# Altium PCB POETIC_Processor_V2b.PcbDoc
Units mm, origin at the board's own origin, x right, y up, seen from the top; angles counter-clockwise.
Board outline 40 x 100 mm, 2 copper layers (Top Layer, Bottom Layer), stack 0.57 mm thick; 36 components, 395 nets, 163 pads, 24 vias.
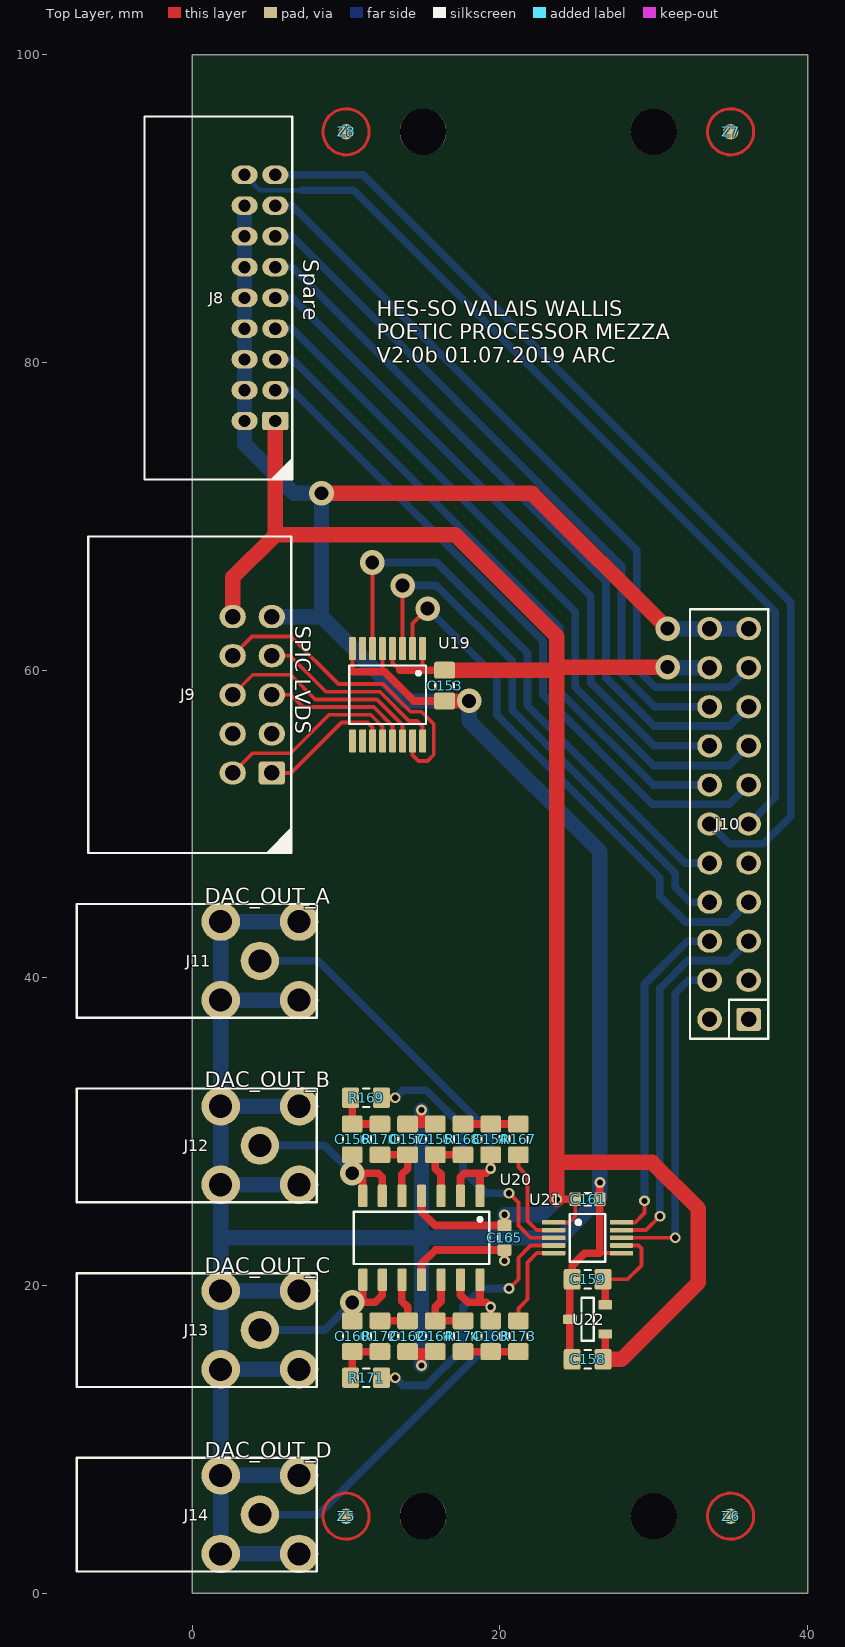
[diagram p0: Top Layer view]
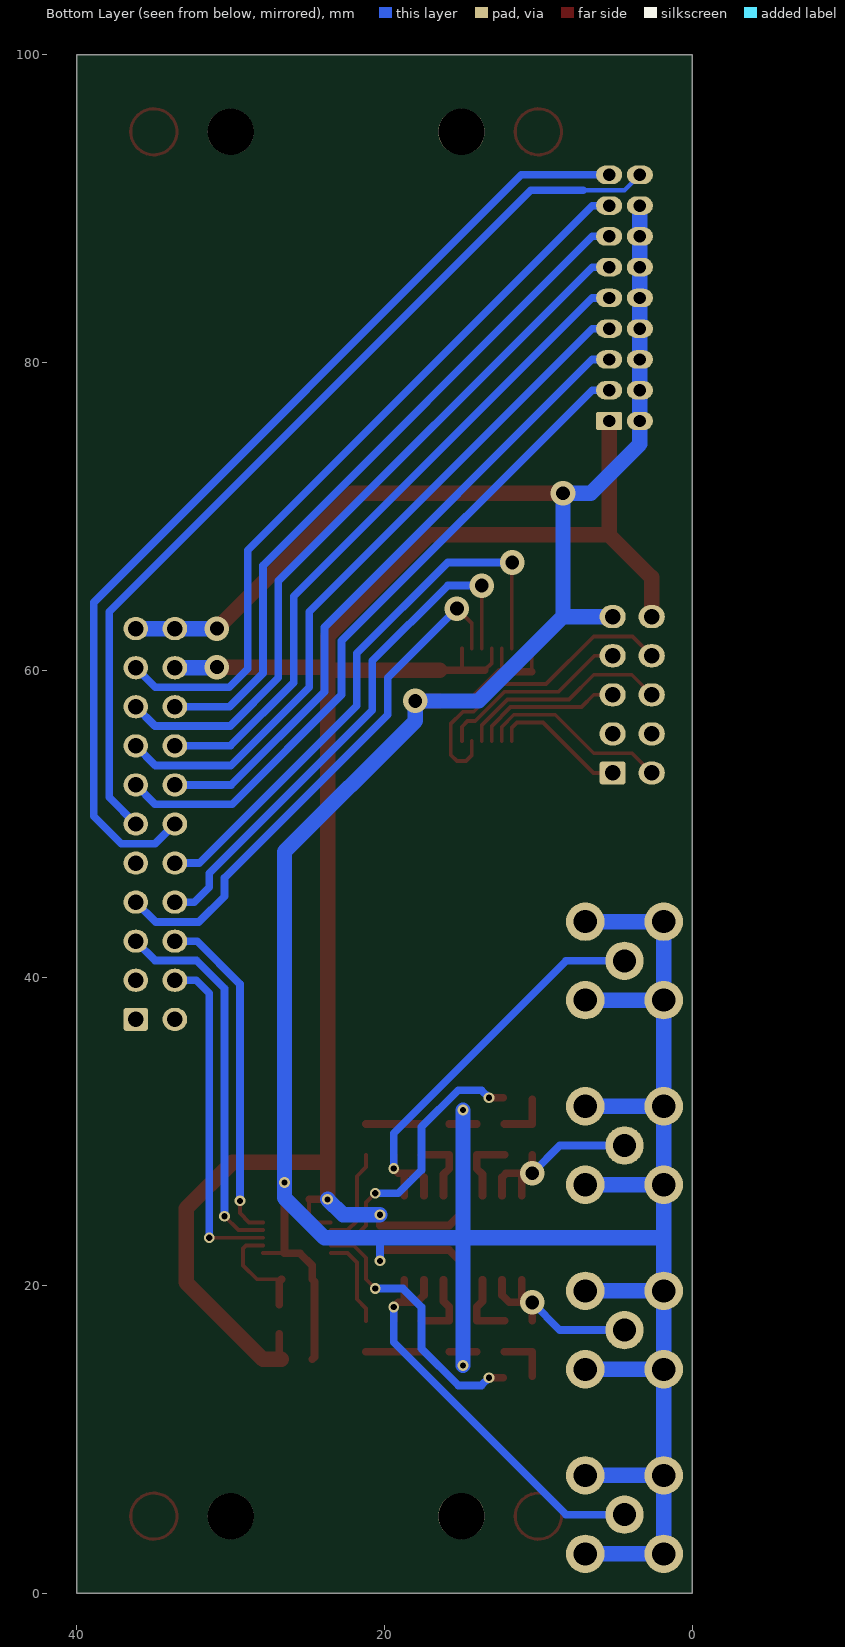
[diagram p1: Bottom Layer view, seen from below]

## Layer stack, top to bottom
Top Layer: signal copper 0.035
Dielectric 2: prepreg 0.5, FR-4, Dk 4.2
Bottom Layer: signal copper 0.035

## Board outline
0,0 40,0 40,100 0,100

## Design rules (kind name [scope] priority, off if disabled: settings)
AcuteAngle [All] p1: minimum=9.00000000000000E+0001 checktracksonly=TRUE
AssemblyTestPointUsage [All] p1 off:
AssemblyTestpoint [All] p1 off: testpointundercomponent=TRUE minsize=1.016 maxsize=2.54 preferedsize=1.524 minholesize=0 maxholesize=1.016 preferedholesize=0.813 testpointgrid=0.025 usegrid=TRUE gridtolerance=0 allowsidetop=TRUE allowsidebottom=TRUE
BoardOutlineClearance [All] p1 off: gap=0.25 ignorepadtopadclearanceinfootprint=FALSE
Clearance [All] p1: gap=0.25 ignorepadtopadclearanceinfootprint=FALSE except(0: Arc-Hole Track-Hole SMDPad-Hole THPad-Hole Via-Hole Fill-Hole Poly-Hole Region-Hole Text-Hole; 0.2: Arc-Track Arc-SMDPad Track-Track Track-SMDPad SMDPad-SMDPad)
ComponentClearance [All] p1 off: gap=0.25 collisioncheckmode=3 verticalgap=0.25 showdistances=FALSE
DiffPairsRouting [All] p1 off: maxlimit=0.254 minlimit=0.254 mostfreqgap=0.254 toplayer_minwidth=0.381 toplayer_maxwidth=0.381 toplayer_prefwidth=0.381 bottomlayer_minwidth=0.381 bottomlayer_maxwidth=0.381 bottomlayer_prefwidth=0.381 maxuncoupledlength=12.7
FabricationTestPointUsage [All] p1 off: valid=0 allowmultiple=FALSE
FabricationTestpoint [All] p1 off: side=3 testpointundercomponent=TRUE minsize=1.016 maxsize=2.54 preferedsize=1.524 minholesize=0 maxholesize=1.016 preferedholesize=0.813 testpointgrid=0.025 allowsidetop=TRUE allowsidebottom=TRUE usegrid=TRUE gridtolerance=0
FanoutControl Fanout_BGA [IsBGA] p1 off: bgadir=Out bgaviamode=Centered fanoutstyle=Auto fanoutdirection=Alternating viagrid=0.025 // Fanout_BGA (Default Rule)
FanoutControl Fanout_LCC [IsLCC] p2 off: bgadir=Out bgaviamode=Centered fanoutstyle=Auto fanoutdirection=Alternating viagrid=0.025 // Fanout_LCC (Default Rule)
FanoutControl Fanout_SOIC [IsSOIC] p3 off: bgadir=Out bgaviamode=Centered fanoutstyle=Auto fanoutdirection=Alternating viagrid=0.025 // Fanout_SOIC (Default Rule)
FanoutControl Fanout_Small [(CompPinCount < 5)] p4 off: bgadir=Out bgaviamode=Centered fanoutstyle=Auto fanoutdirection=OutThenIn viagrid=0.025 // Fanout_Small (Default Rule)
FanoutControl Fanout_Default [All] p5 off: bgadir=Out bgaviamode=Centered fanoutstyle=Auto fanoutdirection=Alternating viagrid=0.025 // Fanout_Default (Default Rule)
Height [All] p1 off: minheight=0 maxheight=25.4 prefheight=12.7
HoleSize [All] p1 off: absolutevalues=TRUE maxlimit=3 minlimit=0.15 maxpercent=80.000 minpercent=20.000
HoleToHoleClearance [All] p1 off: gap=0.25 allowstackedmicrovias=TRUE
LayerPairs [All] p1 off: enforce=TRUE
MinimumAnnularRing [All] p1 off: minimumring=0.35
MinimumSolderMaskSliver [All] p1 off: minsoldermaskwidth=0
PasteMaskExpansion [All] p1 off: expansion=0
PlaneClearance [All] p1: clearance=0.25
PlaneConnect [All] p1: planeconnectstyle=Relief reliefexpansion=0.25 reliefentries=4 reliefconductorwidth=0.25 reliefairgap=0.25
PolygonConnect [All] p1: connectstyle=Relief reliefconductorwidth=0.25 reliefentries=4 polygonreliefangle="90 Angle" airgapwidth=0.25
RoutingCorners [All] p1 off: cornerstyle=45-Degree minsetback=2.5 maxsetback=2.5
RoutingLayers [All] p1 off: top layer_v5=TRUE bottom layer_v5=TRUE
RoutingPriority [All] p1 off: routingpriority=0
RoutingTopology [All] p1 off: topology=Shortest
RoutingVias [All] p1: holewidth=0.4 width=0.7 viastyle="Through Hole" minholewidth=0.4 minwidth=0.7 maxholewidth=0.4 maxwidth=0.7
SilkToBoardRegionClearance [All] p1 off:
SilkToSilkClearance [All] p1 off: silktosilkclearance=0
SilkToSolderMaskClearance [IsPad] p1 off: minsilkscreentomaskgap=0 clearancetoexposedcopper=TRUE
SolderMaskExpansion [All] p1 off: expansion=0
Width [All] p1: maxlimit=10 minlimit=0.2 preferedwidth=1
4 further rules are at their usual default settings.

## Classes and differential pairs
component class Processor: Z5 Z6 Z7 Z8
component class Supply: TP3
component class Mezz_Board: C153 C154 C155 C156 C157 C158 C159 C160 C161 C162 C163 C164 C165 J8 J9 J10 J11 J12 J13 J14 R167 R168 R169 R170 R171 R172 R173 R174 U19 U20 U21 U22

## Components (designator, comment, footprint, x,y, rotation, side; value= is the part's Value field where it differs from the comment)
C153 "100n" "CAPACITOR 2012 REFLOW" 16.4,59 r90 top
C154 "100p" "CAPACITOR 2012 REFLOW" 19.4,29.5 r270 top
C155 "150p" "CAPACITOR 2012 REFLOW" 15.8,29.5 r270 top
C156 "100p" "CAPACITOR 2012 REFLOW" 10.4,29.5 r270 top
C157 "150p" "CAPACITOR 2012 REFLOW" 14,29.5 r270 top
C158 "100n" "CAPACITOR 2012 REFLOW" 25.7,15.2 r0 top
C159 "1u" "CAPACITOR 2012 REFLOW" 25.7,20.4 r0 top
C160 "100p" "CAPACITOR 2012 REFLOW" 10.4,16.7 r90 top
C161 "100n" "CAPACITOR 1608 REFLOW" 25.7,25.6 r180 top
C162 "150p" "CAPACITOR 2012 REFLOW" 14,16.7 r90 top
C163 "100p" "CAPACITOR 2012 REFLOW" 19.4,16.7 r90 top
C164 "150p" "CAPACITOR 2012 REFLOW" 15.8,16.7 r90 top
C165 "100n" "CAPACITOR 1608 REFLOW" 20.299,23.1 r90 top
J8 "98464-G61-18ULF" "FlatCable2x9 2MM Right Angle TH FCI 98614-G61-18ULF" 4.4,84.2 r270 top
J9 "61201021721" "FlatCable2x5 2.54MM RIGHT ANGLE TH" 3.9,58.4 r270 top
J10 "*" "PinHeader2x11 P2.54 A" 34.9,50 r90 top
J11 "CONSMA002-G" "SMA TH Right Angle Linx CONSMA002" 4.4,41.1 r0 top
J12 "CONSMA002-G" "SMA TH Right Angle Linx CONSMA002" 4.4,29.1 r0 top
J13 "CONSMA002-G" "SMA TH Right Angle Linx CONSMA002" 4.4,17.1 r0 top
J14 "CONSMA002-G" "SMA TH Right Angle Linx CONSMA002" 4.4,5.1 r0 top
R167 "3k3" "RESISTOR 2012 REFLOW" 21.2,29.5 r90 top
R168 "3k6" "RESISTOR 2012 REFLOW" 17.6,29.5 r270 top
R169 "3k3" "RESISTOR 2012 REFLOW" 11.3,32.2 r180 top
R170 "3k6" "RESISTOR 2012 REFLOW" 12.2,29.5 r270 top
R171 "3k3" "RESISTOR 2012 REFLOW" 11.3,14 r180 top
R172 "3k6" "RESISTOR 2012 REFLOW" 12.2,16.7 r90 top
R173 "3k3" "RESISTOR 2012 REFLOW" 21.2,16.7 r270 top
R174 "3k6" "RESISTOR 2012 REFLOW" 17.6,16.7 r90 top
U19 "DS90LV047ATMTC/NOPB" "TSSOP16 P0.65 C5.0x4.5 H1.1" 12.7,58.4 r270 top
U20 "AD8648ARZ-REEL7" "SO14 P1.27 C4.0X8.8 H1.75" 14.899,23.1 r270 top
U21 "DAC124S085CIMM/NOPB" "VSSOP10 P0.5 C3.1X3.1 H1.1" 25.7,23.1 r0 top
U22 "REF3130AIDBZTG4" "SOT23 P0.95 C1.6x3.0 H1.3" 25.7,17.8 r180 top
Z5 "1 - 3" FIDUCIAL 10,5 r0 top
Z6 "1 - 3" FIDUCIAL 35,5 r0 top
Z7 "1 - 3" FIDUCIAL 35,95 r0 top
Z8 "1 - 3" FIDUCIAL 10,95 r0 top

## Footprints (in the part's own frame and the unit in brackets; to place one, negate y for a bottom-side part, rotate by r counter-clockwise, add the part's x,y. Pads: shape width x height; smd on the part's side, far side on the other; paste and mask are expansions set on the pad)
"CAPACITOR 1608 REFLOW" [mm] "Capacitor SMD 1.6x0.8mm (0603-imperial)"
  rrect25% 0.75x0.9 smd: 1(-0.8,0) 2(0.8,0)
  silkscreen extent -0.2,-0.4 0.2,0.4, body extent -0.8,-0.4 0.8,0.4, height 0.8
"CAPACITOR 2012 REFLOW" [mm] "Capacitor SMD 2.0x1.2mm (0805-imperial)"
  rrect25% 1.1x1.35 smd: 1(-1,0) 2(1,0)
  silkscreen extent -0.2,-0.6 0.2,0.6, body extent -1,-0.6 1,0.6, height 1
FIDUCIAL [mm] "FIDUCIAL Din 1mm Dout 3mm"
  round 1 smd mask+1.2: 1(0,0)
  Top Layer circle w0.2: c0,0 r1.5
"FlatCable2x5 2.54MM RIGHT ANGLE TH" [mm] "FlatCable2x5 2.54MM Right Angle TH, DIN 41651, Generic"
  rrect25% 1.5x1.7 hole 1: 1(5.08,1.27)
  oval 1.5x1.7 hole 1: 2(5.08,-1.27) 3(2.54,1.27) 4(2.54,-1.27) 5(0,1.27) 6(0,-1.27) 7(-2.54,1.27) 8(-2.54,-1.27) 9(-5.08,1.27) 10(-5.08,-1.27)
  silkscreen extent -10.29,-10.67 10.29,2.54, body extent -10.16,-10.54 10.16,1.57, height 9.2
"FlatCable2x9 2MM Right Angle TH FCI 98614-G61-18ULF" [mm] "FlatCable2x9 2MM Right Angle TH FCI 98614-G61-18ULF"
  rrect25% 1.2x1.7 hole 0.8: 1(8,1)
  oval 1.2x1.7 hole 0.8: 2(8,-1) 3(6,1) 4(6,-1) 5(4,1) 6(4,-1) 7(2,1) 8(2,-1) 9(0,1) 10(0,-1) 11(-2,1) 12(-2,-1) 13(-4,1) 14(-4,-1) 15(-6,1) 16(-6,-1) 17(-8,1) 18(-8,-1)
  silkscreen extent -11.8,-7.5 11.8,2.1, body extent -10,-7.2 10,1.3, height 6.1
"PinHeader2x11 P2.54 A" [mm] "Plug connector"
  rrect25% 1.5x1.6 hole 1: 1(-12.7,-1.27)
  oval 1.5x1.6 hole 1: 2(-12.7,1.27) 3(-10.16,-1.27) 4(-10.16,1.27) 5(-7.62,-1.27) 6(-7.62,1.27) 7(-5.08,-1.27) 8(-5.08,1.27) 9(-2.54,-1.27) 10(-2.54,1.27) 11(0,-1.27) 12(0,1.27) 13(2.54,-1.27) 14(2.54,1.27) 15(5.08,-1.27) 16(5.08,1.27) 17(7.62,-1.27) 18(7.62,1.27) 19(10.16,-1.27) 20(10.16,1.27) 21(12.7,-1.27) 22(12.7,1.27)
  silkscreen extent -13.97,-2.54 13.97,2.54, body extent -13.97,-2.54 13.97,2.54, height 8.5
"RESISTOR 2012 REFLOW" [mm] "Resistor SMD 2.0x1.2mm (0805-imperial)"
  rrect25% 1.1x1.35 smd: 1(-1,0) 2(1,0)
  silkscreen extent -0.2,-0.6 0.2,0.6, body extent -1,-0.6 1,0.6, height 0.6
"SMA TH Right Angle Linx CONSMA002" [mm] "Connector SMA TH Right Angle Linx CONSMA002"
  round 2.5 hole 1.5: 1(0,0) 2(-2.55,-2.55) 2(-2.55,2.55) 2(2.55,-2.55) 2(2.55,2.55)
  silkscreen extent -11.9,-3.7 3.7,3.7, body extent -11.71,-3.5 3.5,3.5, height 10
"SO14 P1.27 C4.0X8.8 H1.75" [mm] "SOIC, 14-Leads, Body 4.0X8.8mm, Pitch 1.27mm, IPC Medium Density"
  rrect25% 1.45x0.6 smd: 1(-2.725,3.81) 2(-2.725,2.54) 3(-2.725,1.27) 4(-2.725,0) 5(-2.725,-1.27) 6(-2.725,-2.54) 7(-2.725,-3.81) 8(2.725,-3.81) 9(2.725,-2.54) 10(2.725,-1.27) 11(2.725,0) 12(2.725,1.27) 13(2.725,2.54) 14(2.725,3.81)
  silkscreen extent -1.7,-4.4 1.7,4.4, body extent -2,-4.4 2,4.4, height 1.76
"SOT23 P0.95 C1.6x3.0 H1.3" [mm] "SOT23, 3-Leads, Body 1.6x3.0mm, Pitch 0.95mm, IPC Medium Density"
  rrect25% 0.9x0.6 smd: 1(-1.15,0.95) 2(-1.15,-0.95) 3(1.15,0)
  silkscreen extent -0.4,-1.4 0.4,1.4, body extent -0.8,-1.5 0.8,1.5, height 1.3
"TSSOP16 P0.65 C5.0x4.5 H1.1" [mm] "TSSOP-16 NXP"
  rrect25% 1.5x0.45 smd: 1(-3,2.275) 2(-3,1.625) 3(-3,0.975) 4(-3,0.325) 5(-3,-0.325) 6(-3,-0.975) 7(-3,-1.625) 8(-3,-2.275) 9(3,-2.275) 10(3,-1.625) 11(3,-0.975) 12(3,-0.325) 13(3,0.325) 14(3,0.975) 15(3,1.625) 16(3,2.275)
  silkscreen extent -1.9,-2.5 1.9,2.5, body extent -2.25,-2.5 2.25,2.5, height 1.1
"VSSOP10 P0.5 C3.1X3.1 H1.1" [mm] "VSSOP, 10-Leads, Body 3.10x3.1mm, Pitch 0.5mm, Height 1.1"
  rrect25% 1.5x0.3 smd: 1(-2.2,1) 2(-2.2,0.5) 3(-2.2,0) 4(-2.2,-0.5) 5(-2.2,-1) 6(2.2,-1) 7(2.2,-0.5) 8(2.2,0) 9(2.2,0.5) 10(2.2,1)
  silkscreen extent -1.15,-1.55 1.15,1.55, body extent -1.55,-1.55 1.55,1.55, height 1.1

## Part data
C153 C154 C155 C156 C157 C158 C159 C160 C161 C162 C163 C164 C165: library part Capacitor, "Capacitor"
J8: library part FlatCable2x9, "FlatCable2x9", Manufacturer="Amphenol FCI", Mouser No.=649-98464-G61-18ULF
J9: library part FlatCable2x5, "FlatCable2x5", Manufacturer="Wurth Elektronik", Mouser No.=710-61201021721
J10: library part PinHeader2x11, "Plug connector"
J11 J12 J13 J14: library part "SMA TH RIGHT ANGLE LINX CONSMA002", "SMA TH RIGHT ANGLE LINX CONSMA002", Manufacturer="Linx Technologies", Mouser No.=712-CONSMA002-G
R167 R168 R169 R170 R171 R172 R173 R174: library part Resistor, "Resistor"
U19: library part DS90LV047A, "DS90LV047A 3-V LVDS Quad CMOS Differential Line Driver", Manufacturer="Texas Instruments", Mouser No.=926-DS90LV047ATMTCNO
U20: library part "OPA QUAD", "Generic quad OPA 14 pins", Manufacturer="Analog Devices", Mouser No.=584-AD8648ARZ-R7
U21: library part DAC124S085CIMM, "DAC124S085 12-Bit Micro Power Quad Digital-to-Analog Converter With Rail-to-Rail Output", Manufacturer="Texas Instruments", Mouser No.=926-DAC124S085CIMMNO
U22: library part "REFERENCE SOT23 IN-OUT- GND", "Generic Positive Voltage Reference", Manufacturer="Texas Instruments", Mouser No.=595-REF3130AIDBZTG4
Z5 Z6 Z7 Z8: library part FIDUCIAL, "FIDUCIAL Din 1mm Dout 3mm"

## Free pads (board coordinates)
  round 3 hole 3: 5(15,5) 6(30,5) 7(15,95) 8(30,95)

## Via types
v1: diameter 0.7, hole 0.4, Top Layer to Bottom Layer, tented both sides, 15 vias
v2: diameter 1.6, hole 0.9, Top Layer to Bottom Layer, tented both sides, 9 vias

## Nets (pads, with @x,y where several pads share a name; then routed paths per layer and width w, separated by ;. In a path a pad name is that pad's centre, name@x,y a point inside that pad or via, vN(x,y) a via of type N, cw(c..) or ccw(c..) an arc to the next point about the centre after c; other vN are vias at no path point)
+1V2: 
+1V8_D: 
+3V3_A: 
+3V3_D: C153.2 C158.2 C161.2 C165.2 J8.1 J9.10 J10.20 U19.1 U19.4 U20.4 U21.1 U22.1 | length 135
  Top Layer w0.25: U19.4 13.025,60.475 13.5,60 ; 14.975,60 U19.1 ; U21.1 24.5,24.1 24.9,24.5 C161.2
  Top Layer w0.5: 13.5,60 14.975,60 C153.2 ; U20.4 14.899,24.801 15.8,23.9 C165.2 v1@20.299,24.6 ; v1(23.7,25.6) C161.2 ; C158.2 26.85,15.35 U22.1
  Top Layer w1: J9.10 2.63,66.03 5.4,68.8 ; J8.1 5.4,68.8 ; C153.2 23.7,60 ; v1(23.7,25.6) 23.7,28 ; C158.2 27.9,15.2 32.9,20.2 32.9,25 29.9,28 23.7,28 ; v2(30.9,60.2) 23.7,60.2 ; 5.4,68.8 17.1,68.8 23.7,62.2 23.7,60.2 ; 23.7,28 23.7,60 ; 23.7,60 23.7,60.2
  Bottom Layer w1: v1(20.3,24.6) 22.7,24.6 v1(23.7,25.6) ; v2(30.9,60.2) 30.94,60.16 J10.20
+3V3_F: 
+3V3_USB: 
+5V_USB: 
+24V_BP: J10.1
\S\P\I\A\_\S\T\E\: J10.5 U21.9 | length 24.7
  Top Layer w0.25: U21.9 29.5,23.6 v1(30.4,24.5)
  Bottom Layer w0.5: v1(30.4,24.5) 30.4,39.3 32.23,41.13 34.92,41.13 J10.5
\S\P\I\C\_\S\T\E\: J10.7 U19.2 | length 35
  Top Layer w0.25: U19.2 14.325,63.025 v2(15.3,64)
  Bottom Layer w0.5: v2(15.3,64) 19.8,59.5 19.8,57.1 30.4,46.5 30.4,45.3 32.07,43.63 34.88,43.63 J10.7
\S\P\I\C\_\S\T\E\_\+\: J9.8 U19.15 | length 20.6
  Top Layer w0.25: J9.8 3.89,62.2 6.4,62.2 9.5,59.1 12.4,59.1 14.2,57.3 14.9,57.3 15.7,56.5 15.7,54.5 15.3,54.1 14.7,54.1 14.325,54.475 U19.15
\S\P\I\C\_\S\T\E\_\-\: J9.7 U19.16 | length 12.6
  Top Layer w0.25: J9.7 6.36,60.94 8.7,58.6 12.2,58.6 14.1,56.7 14.6,56.7 14.975,56.325 U19.16
ADC_14: 
ADC_15: 
ADC_A0: 
ADC_A1: 
ADC_A2: 
ADC_A3: 
ADC_A4: 
ADC_A5: 
ADC_B0: 
ADC_B1: 
ADC_B2: 
ADC_B3: 
ADC_C2: 
ADC_C3: 
ADC_C4: 
ADC_D0: 
ADC_D1: 
ADC_D2: 
ADC_D3: 
ADC_D4: 
BN_EN: 
BN_ERROR_R: 
BN_ERROR_W: 
BN_MASTER_RST: 
BP_GPIO_0: 
BP_GPIO_1: 
BP_GPIO_2: 
BP_GPIO_3: 
BP_GPIO_4: 
BP_GPIO_5: 
BP_GPIO_6: 
BP_GPIO_7: 
BP_GPIO_8: 
BP_GPIO_9: 
BP_GPIO_10: 
BP_GPIO_11: 
BP_GPIO_13: 
BP_GPIO_14: 
BP_GPIO_15: 
BP_GPIO_16: 
BP_GPIO_17: 
BP_GPIO_18: 
BP_GPIO_19: 
BP_GPIO_20: 
BP_GPIO_21: 
BP_GPIO_22: 
BP_GPIO_23: 
BP_GPIO_24: 
BP_GPIO_26: 
BP_GPIO_27: 
BP_GPIO_28: 
BP_GPIO_29: 
BP_GPIO_30: 
BP_GPIO_31: 
BP_GPIO_32: 
BP_GPIO_33: 
BP_GPIO_34: 
BP_GPIO_35: 
BP_GPIO_36: 
BP_PWM1A: 
BP_PWM1B: 
BP_PWM2A: 
BP_PWM2B: 
BP_PWM3A: 
BP_PWM3B: 
BP_PWM4A: 
BP_PWM4B: 
BP_PWM5A: 
BP_PWM5B: 
BP_PWM6A: 
BP_PWM6B: 
BP_PWM7A: 
BP_PWM7B: 
BP_PWM8A: 
BP_PWM8B: 
BP_PWM9A: 
BP_PWM9B: 
BP_PWM10A: 
BP_PWM10B: 
BP_PWM11A: 
BP_PWM11B: 
BP_PWM12A: 
BP_PWM12B_BN_PWM: 
CPLD_TCK: 
CPLD_TDI: 
CPLD_TDO: 
CPLD_TMS: 
D+: 
D-: 
D\S\P\_\T\R\S\T\: 
DAC_A: R167.1 U21.2 | length 6.5
  Top Layer w0.25: R167.1 21.2,27.7 21.8,27.1 21.8,24.2 22.4,23.6 U21.2
DAC_B: R169.1 U21.3 | length 17.9
  Top Layer w0.25: v1(20.6,26) 21.2,25.4 21.2,23.9 22,23.1 U21.3
  Top Layer w0.5: R169.1 v1(13.2,32.2)
  Bottom Layer w0.5: v1(13.2,32.2) 13.7,32.7 15.2,32.7 17.6,30.3 17.6,27.5 19.1,26 v1(20.6,26)
DAC_C: R171.1 U21.4 | length 17.6
  Top Layer w0.25: v1(20.6,19.8) 21.2,20.4 21.2,21.8 22,22.6 U21.4
  Top Layer w0.5: R171.1 v1(13.2,14)
  Bottom Layer w0.5: v1(13.2,14) 13.7,13.5 15.2,13.5 17.6,15.9 17.6,18.6 18.8,19.8 v1(20.6,19.8)
DAC_D: R173.1 U21.5 | length 6
  Top Layer w0.25: R173.1 21.2,18.5 21.8,19.1 21.8,21.5 22.4,22.1 U21.5
DAC_OUT_A: C154.2 J11.1 U20.1 U20.2 | length 28.6
  Top Layer w0.5: U20.2 17.439,27.039 17.7,27.3 18.7,27.3 18.709,27.291 ; U20.1 18.709,27.291 ; 18.709,27.291 19.091,27.291 v1(19.4,27.6) ; v1(19.4,27.6) C154.2 v1(19.4,27.6)
  Bottom Layer w0.5: J11.1 8.2,41.1 19.4,29.9 v1(19.4,27.6)
DAC_OUT_B: C156.2 J12.1 U20.6 U20.7 | length 12.7
  Top Layer w0.5: C156.2 v2(10.4,27.3) v2@11.089,27.3 ; U20.7 v2@11.089,27.3 ; U20.6 12.359,27.041 12.1,27.3 v2@11.089,27.3
  Bottom Layer w0.5: J12.1 8.6,29.1 v2(10.4,27.3)
DAC_OUT_C: C160.2 J13.1 U20.8 U20.9 | length 12.6
  Top Layer w0.5: C160.2 v2(10.4,18.9) v2@11.089,18.9 ; U20.8 v2@11.089,18.9 ; U20.9 12.359,19.359 11.9,18.9 v2@11.089,18.9
  Bottom Layer w0.5: J13.1 8.6,17.1 v2(10.4,18.9)
DAC_OUT_D: C163.2 J14.1 U20.13 U20.14 | length 27.6
  Top Layer w0.5: U20.13 17.439,19.361 17.9,18.9 18.7,18.9 ; U20.14 18.709,18.909 18.7,18.9 ; C163.2 v1(19.4,18.6) 19.1,18.9 18.7,18.9
  Bottom Layer w0.5: J14.1 8.2,5.1 19.4,16.3 v1(19.4,18.6)
DSP_CLK_OUT: 
DSP_PWM1A: 
DSP_PWM1B: 
DSP_PWM2A: 
DSP_PWM2B: 
DSP_PWM3A: 
DSP_PWM3B: 
DSP_PWM4A: 
DSP_PWM4B: 
DSP_PWM5A: 
DSP_PWM5B: 
DSP_PWM6A: 
DSP_PWM6B: 
DSP_PWM7A: 
DSP_PWM7B: 
DSP_PWM8A: 
DSP_PWM8B: 
DSP_PWM9A: 
DSP_PWM9B: 
DSP_PWM10A: 
DSP_PWM10B: 
DSP_PWM11A: 
DSP_PWM11B: 
DSP_PWM12A: 
DSP_PWM12B: 
DSP_TCK: 
DSP_TDI: 
DSP_TDO: 
DSP_TMS: 
GND_+24V_BP: J10.2
GND_A: 
GND_D: C153.1 C155.1 C157.1 C158.1 C159.1 C161.1 C162.1 C164.1 C165.1 J8.2 J8.4 J8.6 J8.8 J8.10 J8.12 J8.14 J8.16 J9.9 J10.21 J10.22 J11.2 J12.2 J13.2 J14.2 U19.5 U19.8 U20.11 U21.6 U22.3 | length 276.5
  Top Layer w0.25: 10.425,59.9 U19.8 ; 12.375,59.9 U19.5 ; 26.5,22.1 U21.6
  Top Layer w0.5: 10.425,59.9 12.375,59.9 12.5,59.9 14.4,58 C153.1 ; C162.1 14.9,15.7 ; C157.1 14.9,30.5 ; U20.11 14.899,21.399 15.8,22.3 C165.1 v1(20.3,21.6) ; v1(14.9,14.8) 14.9,15.7 ; v1(14.9,31.4) 14.9,30.5 ; C164.1 14.9,15.7 ; C155.1 14.9,30.5 ; C158.1 24.55,15.35 U22.3 24.55,20.25 C159.1 24.7,21.3 25.5,22.1 26.5,22.1 C161.1 v1(26.5,26.7)
  Top Layer w1: v2(8.4,71.5) 22.1,71.5 v2(30.9,62.7) ; C153.1 v2(18,58)
  Bottom Layer w0.5: v1(20.3,21.6) 20.3,23.1
  Bottom Layer w1: J8.16 J8.14 J8.12 J8.10 J8.8 J8.6 J8.4 J8.2 3.4,74.7 6.6,71.5 v2(8.4,71.5) 8.4,63.48 ; J9.9@5.2,63.48 8.4,63.48 ; J14.2@6.95,2.55 1.85,2.55 J14.2@1.85,7.65 ; J14.2@6.95,7.65 J14.2@1.85,7.65 ; J13.2@6.95,14.55 J13.2@1.85,14.55 ; J13.2@6.95,19.65 J13.2@1.85,19.65 ; J12.2@6.95,26.55 J12.2@1.85,26.55 ; J12.2@6.95,31.65 J12.2@1.85,31.65 ; J11.2@6.95,38.55 J11.2@1.85,38.55 ; J11.2@6.95,43.65 1.85,43.65 J11.2@1.85,38.55 ; v1(14.9,14.8) 14.9,23.1 ; v1(14.9,31.4) 14.9,23.1 ; v2(30.9,62.7) J10.22 J10.21 ; J14.2@1.85,7.65 J13.2@1.85,14.55 ; J13.2@1.85,14.55 J13.2@1.85,19.65 ; J13.2@1.85,19.65 1.85,23.1 ; 1.85,23.1 J12.2@1.85,26.55 ; 1.85,23.1 14.9,23.1 ; J12.2@1.85,26.55 J12.2@1.85,31.65 ; J12.2@1.85,31.65 J11.2@1.85,38.55 ; 8.4,63.48 13.88,58 v2(18,58) 18,56.7 26.5,48.2 v1(26.5,26.7) 26.5,25.7 23.9,23.1 20.3,23.1 14.9,23.1
GND_OSC: 
GND_USB: 
GPIO24: 
GPIO25: 
GPIO26: 
GPIO27: 
GPIO28: 
GPIO29: 
GPIO30: 
GPIO31: 
GPIO32: 
GPIO33: 
GPIO34: 
GPIO35: 
GPIO36: 
GPIO37: 
GPIO40: 
GPIO41: 
GPIO42: 
GPIO43: 
GPIO44: 
GPIO45: 
GPIO46: 
GPIO47: 
GPIO58: 
GPIO59: 
GPIO60: 
GPIO61: 
GPIO62: 
GPIO63: 
GPIO64: 
GPIO65: 
GPIO66: 
GPIO67: 
GPIO68: 
GPIO69: 
GPIO70: 
GPIO71: 
GPIO72: 
GPIO74: 
GPIO75: 
GPIO76: 
GPIO77: 
GPIO78: 
GPIO79: 
GPIO80: 
GPIO81: 
GPIO82: 
GPIO83: 
GPIO84: 
GPIO85: 
GPIO86: 
GPIO87: 
GPIO88: 
GPIO89: 
GPIO90: 
GPIO91: 
GPIO92: 
GPIO93: 
GPIO94: 
GPIO99: 
GPIO133: 
JTAG_TRST: 
LED1_0_GREEN: 
LED1_0_RED: 
LED1_1_GREEN: 
LED1_1_RED: 
LED1_2_GREEN: 
LED1_2_RED: 
LED1_3_GREEN: 
LED1_3_RED: 
LED2_0_GREEN: 
LED2_0_RED: 
LED2_1_GREEN: 
LED2_1_RED: 
LED2_2_GREEN: 
LED2_2_RED: 
LED2_3_GREEN: 
LED2_3_RED: 
MEAS_0_MINUS: 
MEAS_0_PLUS: 
MEAS_1_MINUS: 
MEAS_1_PLUS: 
MEAS_2_MINUS: 
MEAS_2_PLUS: 
MEAS_3_MINUS: 
MEAS_3_PLUS: 
MEAS_4_MINUS: 
MEAS_4_PLUS: 
MEAS_5_MINUS: 
MEAS_5_PLUS: 
MEAS_6_MINUS: 
MEAS_6_PLUS: 
MEAS_7_MINUS: 
MEAS_7_PLUS: 
MEAS_8_MINUS: 
MEAS_8_PLUS: 
MEAS_9_MINUS: 
MEAS_9_PLUS: 
MEAS_10_MINUS: 
MEAS_10_PLUS: 
MEAS_11_MINUS: 
MEAS_11_PLUS: 
MEAS_12_MINUS: 
MEAS_12_PLUS: 
MEAS_13_MINUS: 
MEAS_13_PLUS: 
MEAS_14_MINUS: 
MEAS_14_PLUS: 
MEAS_15_MINUS: 
MEAS_15_PLUS: 
MEAS_16_MINUS: 
MEAS_16_PLUS: 
MEAS_17_MINUS: 
MEAS_17_PLUS: 
MEAS_18_MINUS: 
MEAS_18_PLUS: 
MEAS_19_MINUS: 
MEAS_19_PLUS: 
NetC1_2: 
NetC2_2: 
NetC41_2: 
NetC45_1: 
NetC45_2: 
NetC54_1: 
NetC54_2: 
NetC55_2: 
NetC57_2: 
NetC88_1: 
NetC88_2: 
NetC89_1: 
NetC89_2: 
NetC92_2: 
NetC93_2: 
NetC94_1: 
NetC94_2: 
NetC95_1: 
NetC95_2: 
NetC98_2: 
NetC99_2: 
NetC100_1: 
NetC100_2: 
NetC101_1: 
NetC101_2: 
NetC104_2: 
NetC105_2: 
NetC106_1: 
NetC106_2: 
NetC107_1: 
NetC107_2: 
NetC110_2: 
NetC111_2: 
NetC114_1: 
NetC114_2: 
NetC115_1: 
NetC115_2: 
NetC118_2: 
NetC119_2: 
NetC120_1: 
NetC120_2: 
NetC121_1: 
NetC121_2: 
NetC124_2: 
NetC125_2: 
NetC126_1: 
NetC126_2: 
NetC127_1: 
NetC127_2: 
NetC130_2: 
NetC131_2: 
NetC132_1: 
NetC132_2: 
NetC133_1: 
NetC133_2: 
NetC136_2: 
NetC137_2: 
NetC140_1: 
NetC140_2: 
NetC142_2: 
NetC143_1: 
NetC143_2: 
NetC145_2: 
NetC146_1: 
NetC146_2: 
NetC148_2: 
NetC149_1: 
NetC149_2: 
NetC151_2: 
NetC154_1: C154.1 R167.2 R168.1 | length 3.6
  Top Layer w0.5: R168.1 C154.1 R167.2
NetC155_2: C155.2 R168.2 U20.3 | length 4.6
  Top Layer w0.5: U20.3 16.169,27.231 15.8,27.6 C155.2 R168.2
NetC156_1: C156.1 R169.2 R170.1 | length 3.4
  Top Layer w0.5: R169.2@10.4,32.1 C156.1 R170.1
NetC157_2: C157.2 R170.2 U20.5 | length 4.6
  Top Layer w0.5: R170.2 C157.2 14,27.6 13.629,27.229 U20.5
NetC159_2: C159.2 U21.7 U22.2 | length 7.1
  Top Layer w0.25: C159.2 28.3,20.4 29.2,21.3 29.2,22.4 29,22.6 U21.7
  Top Layer w0.5: C159.2 26.85,20.25 U22.2
NetC160_1: C160.1 R171.2 R172.1 | length 3.4
  Top Layer w0.5: R171.2@10.4,14.1 C160.1 R172.1
NetC162_2: C162.2 R172.2 U20.10 | length 4.6
  Top Layer w0.5: R172.2 C162.2 14,18.6 13.629,18.971 U20.10
NetC163_1: C163.1 R173.2 R174.1 | length 3.6
  Top Layer w0.5: R174.1 C163.1 R173.2
NetC164_2: C164.2 R174.2 U20.12 | length 4.6
  Top Layer w0.5: U20.12 16.169,18.969 15.8,18.6 C164.2 R174.2
NetJ1_13: 
NetJ1_14: 
NetJP1_1: 
NetJP2_1: 
NetJP5_3: 
NetJP6_3: 
NetJP7_3: 
NetJP8_3: 
NetJP9_3: 
NetJP10_3: 
NetL1_1: 
NetLD1_2: 
NetLD2_2: 
NetLD3_2: 
NetLD4_1: 
NetLD4_3: 
NetLD4_5: 
NetLD4_7: 
NetLD5_1: 
NetLD5_3: 
NetLD5_5: 
NetLD5_7: 
NetR7_2: 
NetR23_1: 
NetR27_1: 
NetR28_2: 
NetR29_2: 
Push_BT_0: 
Push_BT_1: 
Push_BT_2: 
PWR_ON_RST: 
REF_1V5: 
SCIA_RX: 
SCIA_TX: 
SCIC_RX: J8.18 J10.11 | length 60.8
  Bottom Layer w0.3: J8.18 4.4,91.2 7.1,91.2
  Bottom Layer w0.5: 7.1,91.2 10.5,91.2 37.9,63.8 37.9,51.73 J10.11
SCIC_TX: J8.17 J10.12 | length 65.5
  Bottom Layer w0.5: J8.17 11.1,92.2 38.9,64.4 38.9,50.5 37.11,48.71 34.92,48.71 J10.12
Spare_0: J8.3 J10.13 | length 44.5
  Bottom Layer w0.5: J8.3 6.5,78.2 22.8,61.9 22.8,58.4 29.91,51.29 34.92,51.29 J10.13
Spare_1: J8.5 J10.14 | length 42.1
  Bottom Layer w0.5: J8.5 6.5,80.2 23.9,62.8 23.9,58.6 29.96,52.54 J10.14
Spare_2: J8.7 J10.15 | length 45.9
  Bottom Layer w0.5: J8.7 6.5,82.2 24.9,63.8 24.9,58.9 30,53.8 34.89,53.8 J10.15
Spare_3: J8.9 J10.16 | length 43.6
  Bottom Layer w0.5: J8.9 6.5,84.2 25.9,64.8 25.9,59.2 30.02,55.08 J10.16
Spare_4: J8.11 J10.17 | length 47.3
  Bottom Layer w0.5: J8.11 6.5,86.2 26.9,65.8 26.9,59.5 30.03,56.37 34.92,56.37 J10.17
Spare_5: J8.13 J10.18 | length 45
  Bottom Layer w0.5: J8.13 6.5,88.2 27.9,66.8 27.9,59.8 30.08,57.62 J10.18
Spare_6: J8.15 J10.19 | length 48.8
  Bottom Layer w0.5: J8.15 6.5,90.2 28.9,67.8 28.9,60.1 30.1,58.9 34.91,58.9 J10.19
SPIA_CLK: J10.6 U21.10 | length 22
  Top Layer w0.25: U21.10 28.8,24.1 29.4,24.7 v1(29.4,25.5)
  Bottom Layer w0.5: v1(29.4,25.5) 29.4,39.6 32.18,42.38 J10.6
SPIA_SIMO: J10.4 U21.8 | length 22
  Top Layer w0.25: U21.8 v1(31.4,23.1)
  Bottom Layer w0.5: v1(31.4,23.1) 31.4,39 32.24,39.84 J10.4
SPIA_SOMI: J10.3
SPIC_CLK: J10.8 U19.3 | length 35
  Top Layer w0.25: U19.3 v2(13.675,65.5)
  Bottom Layer w0.5: v2(13.675,65.5) 15.9,65.5 20.8,60.6 20.8,57.4 31.4,46.8 31.4,45.9 32.38,44.92 J10.8
SPIC_CLK_+: J9.6 U19.14 | length 14
  Top Layer w0.25: J9.6 3.93,59.7 6.4,59.7 8,58.1 12,58.1 13.675,56.425 U19.14
SPIC_CLK_-: J9.5 U19.13 | length 9.7
  Top Layer w0.25: J9.5 6.4,58.4 7.2,57.6 11.8,57.6 13.025,56.375 U19.13
SPIC_SIMO: J10.10 U19.6 | length 37.6
  Top Layer w0.25: v2(11.7,67) 11.725,66.975 U19.6
  Bottom Layer w0.5: v2(11.7,67) 15.9,67 21.8,61.1 21.8,57.7 32.04,47.46 J10.10
SPIC_SIMO_+: J9.2 U19.12 | length 12.6
  Top Layer w0.25: J9.2 3.91,54.6 6.4,54.6 8.9,57.1 11.6,57.1 12.375,56.325 U19.12
SPIC_SIMO_-: J9.1 U19.11 | length 8.9
  Top Layer w0.25: J9.1 6.42,53.32 9.7,56.6 11.4,56.6 11.725,56.275 U19.11
SPIC_SOMI: J10.9
USB_RX: 
USB_TX: 
VREFHI_ALL: 
pads on no net: J9.3 J9.4 U19.7 U19.9 U19.10 Z5.1 Z6.1 Z7.1 Z8.1

## Silkscreen, mask and mechanical layers (free items; w line width, h text height)
Top Overlay:
  text "Spare" at 7.2,86.7 h1 r270
  text "HES-SO VALAIS WALLIS / POETIC PROCESSOR MEZZA / V2.0b 01.07.2019 ARC" at 12,80 h1
  text "SPIC LVDS" at 6.7,62.9 h1 r270
  text "DAC_OUT_A" at 0.8,44.8 h1
  text "DAC_OUT_B" at 0.8,32.9 h1
  text "DAC_OUT_C" at 0.8,20.8 h1
  text "DAC_OUT_D" at 0.8,8.8 h1
Mechanical 1:
  lines w0.15: 160,-100 160,0 ; 0,0 40,0 40,100 0,100 0,0